# EAGLE board untitled (EAGLE 9.6.2)
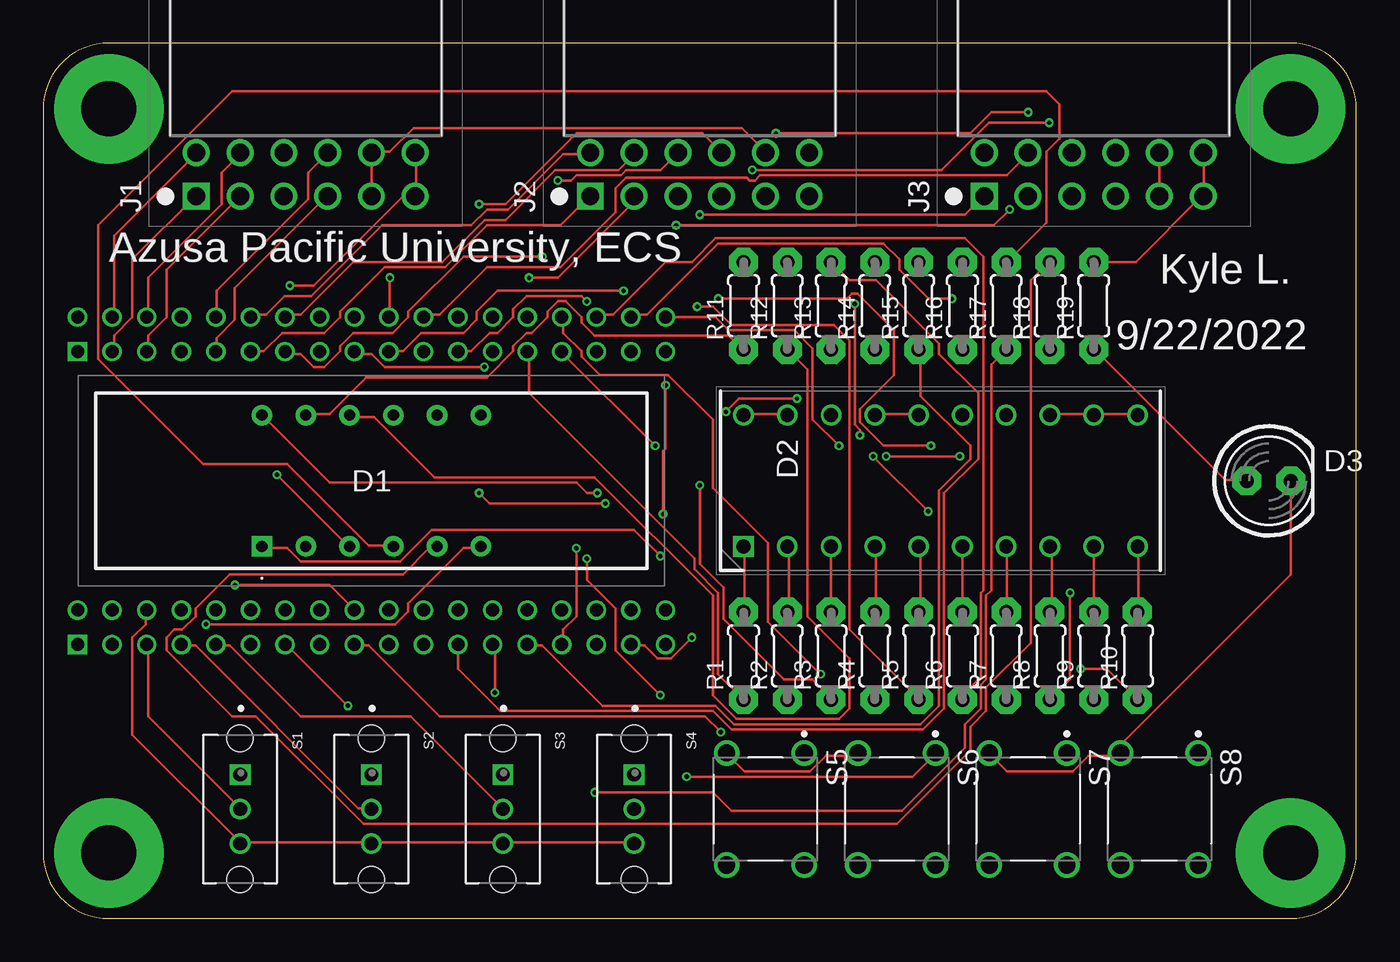
[diagram p0: board, top side]
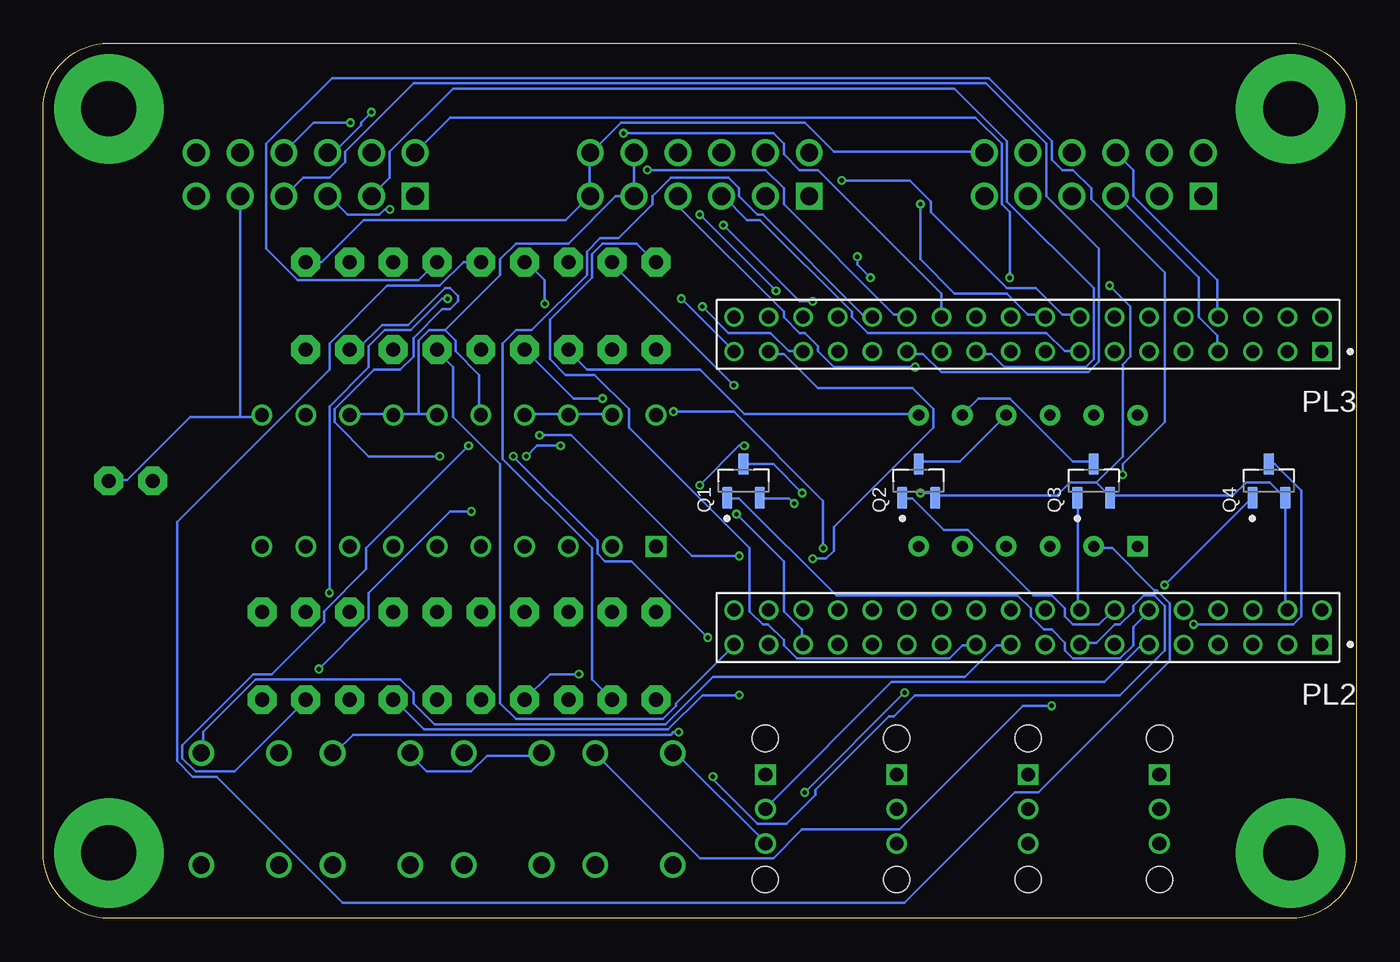
[diagram p1: board, bottom side, seen from below]

Size 76.2 x 50.8 mm. Coordinates in mm from the lower left corner, seen from the top.
Outline: 3.81,0 72.39,0 arc90 76.2,3.81 76.2,46.99 arc90 72.39,50.8 3.81,50.8 arc90 0,46.99 0,3.81 arc90 3.81,0
Copper layers (1*16): Top 0.035559375mm / dielectric 1.6mm / Bottom 0.035559375mm
Design rules "oshpark-2layer *": minimum track width 6mil, minimum drill 10mil, track to track 6mil, track to pad 6mil, pad to pad 6mil, via to via 6mil, smd to smd 6mil, copper to edge 15mil, drill to drill 6mil, minimum pad ring 5mil, minimum via ring 5mil, stop-mask expansion 2.5mil, vias tented up to drill 15mil, thermal gap 10mil

## Footprints (pad centres in the part's own frame; a part is rotated, then mirrored left to right if it is on the bottom)
LDQM282RI = drill 0.65 pad 1.192 square: 1 0,0 | drill 0.65 pad 1.192: 2 2.54,0; 3 5.08,0; 4 7.62,0; 5 10.16,0; 6 12.7,0; 7 12.7,7.62; 8 10.16,7.62; 9 7.62,7.62; 10 5.08,7.62; 11 2.54,7.62; 12 0,7.62
DIPS762W50P254L2527H825Q20N = drill 0.8 pad 1.2 square: 1 0,0 | drill 0.8 pad 1.2: 2 0,-2.54; 3 0,-5.08; 4 0,-7.62; 5 0,-10.16; 6 0,-12.7; 7 0,-15.24; 8 0,-17.78; 9 0,-20.32; 10 0,-22.86; 11 7.62,-22.86; 12 7.62,-20.32; 13 7.62,-17.78; 14 7.62,-15.24; 15 7.62,-12.7; 16 7.62,-10.16; 17 7.62,-7.62; 18 7.62,-5.08; 19 7.62,-2.54; 20 7.62,0
LED5MM = drill 0.813 pad 1.676 octagon: A -1.27,0; K 1.27,0
PMOD-SOCKET-FOR-HOST-BOARD = drill 1.04 pad 1.55 square: 1 0,0 | drill 1.04 pad 1.55: 2 2.54,0; 3 5.08,0; 4 7.62,0; 5 10.16,0; 6 12.7,0; 7 0,2.54; 8 2.54,2.54; 9 5.08,2.54; 10 7.62,2.54; 11 10.16,2.54; 12 12.7,2.54
MT_125_250 = drill 3.175 pad 6.35: 1 0,0
TE_4-1734506-1 = drill 0.75 pad 1.1 square: 1 0,0 | drill 0.75 pad 1.1: 2 0,-2; 3 2.007,0; 4 2.007,-2; 5 4.013,0; 6 4.013,-2; 7 6.02,0; 8 6.02,-2; 9 8.026,0; 10 8.026,-2; 11 10.033,0; 12 10.033,-2; 13 12.04,0; 14 12.04,-2; 15 14.046,0; 16 14.046,-2; 17 16.053,0; 18 16.053,-2; 19 18.059,0; 20 18.059,-2; 21 20.066,0; 22 20.066,-2; 23 22.073,0; 24 22.073,-2; 25 24.079,0; 26 24.079,-2; 27 26.086,0; 28 26.086,-2; 29 28.092,0; 30 28.092,-2; 31 30.099,0; 32 30.099,-2; 33 32.106,0; 34 32.106,-2; 35 34.112,0; 36 34.112,-2
SOT95P230X110-3N = smd 1.26 x 0.59: 1 -0.98,0.95; 2 -0.98,-0.95; 3 0.98,0
0204/5 = drill 0.813 pad 1.676 octagon: 1 -2.54,0; 2 2.54,0
SW_OS102011MS2QN1 = drill 0.8 square: 1 -2,0 | drill 0.8: 2 0,0; 3 2,0 | hole 1.5: -4.1,0; 4.1,0
SW_1825910-7 = drill 0.99: 1 -3.25,2.25; 2 3.25,2.25; 3 -3.25,-2.25; 4 3.25,-2.25

## Placement (x,y rotation side)
D1  [LDQM282RI]  12.7,21.59 0 top
D2  [DIPS762W50P254L2527H825Q20N]  40.64,21.59 90 top
D3  [LED5MM]  71.12,25.4 0 top
J1  [PMOD-SOCKET-FOR-HOST-BOARD]  8.89,41.91 0 top
J2  [PMOD-SOCKET-FOR-HOST-BOARD]  31.75,41.91 0 top
J3  [PMOD-SOCKET-FOR-HOST-BOARD]  54.61,41.91 0 top
MT1  [MT_125_250]  3.81,3.81 0 top
MT2  [MT_125_250]  72.39,46.99 0 top
MT3  [MT_125_250]  3.81,46.99 0 top
MT4  [MT_125_250]  72.39,3.81 0 top
PL2  [TE_4-1734506-1]  2,15.9 180 bottom
PL3  [TE_4-1734506-1]  2,32.9 180 bottom
Q1  [SOT95P230X110-3N]  35.56,25.4 90 bottom
Q2  [SOT95P230X110-3N]  25.4,25.4 90 bottom
Q3  [SOT95P230X110-3N]  15.24,25.4 90 bottom
Q4  [SOT95P230X110-3N]  5.08,25.4 90 bottom
R1  [0204/5]  40.64,15.24 90 top
R2  [0204/5]  43.18,15.24 90 top
R3  [0204/5]  45.72,15.24 90 top
R4  [0204/5]  48.26,15.24 90 top
R5  [0204/5]  50.8,15.24 90 top
R6  [0204/5]  53.34,15.24 90 top
R7  [0204/5]  55.88,15.24 90 top
R8  [0204/5]  58.42,15.24 90 top
R9  [0204/5]  60.96,15.24 90 top
R10  [0204/5]  63.5,15.24 90 top
R11  [0204/5]  40.64,35.56 90 top
R12  [0204/5]  43.18,35.56 90 top
R13  [0204/5]  45.72,35.56 90 top
R14  [0204/5]  48.26,35.56 90 top
R15  [0204/5]  50.8,35.56 90 top
R16  [0204/5]  53.34,35.56 90 top
R17  [0204/5]  55.88,35.56 90 top
R18  [0204/5]  58.42,35.56 90 top
R19  [0204/5]  60.96,35.56 90 top
S1  [SW_OS102011MS2QN1]  11.43,6.35 270 top
S2  [SW_OS102011MS2QN1]  19.05,6.35 270 top
S3  [SW_OS102011MS2QN1]  26.67,6.35 270 top
S4  [SW_OS102011MS2QN1]  34.29,6.35 270 top
S5  [SW_1825910-7]  41.91,6.35 270 top
S6  [SW_1825910-7]  49.53,6.35 270 top
S7  [SW_1825910-7]  57.15,6.35 270 top
S8  [SW_1825910-7]  64.77,6.35 270 top

## Library data of the parts
D1 = eagle-library-engr-240-f22; DESCRIPTION: LED Displays & Accessories LED Display; HEIGHT: 6.05mm; MANUFACTURER_NAME: Lumex; MANUFACTURER_PART_NUMBER: LDQ-M282RI; MOUSER_PART_NUMBER: 696-LDQ-M282RI; MOUSER_PRICE-STOCK: https://www.mouser.com/Search/Refine.aspx?Keyword=696-LDQ-M282RI
D2 = eagle-library-engr-240-f22; DESCRIPTION: LED Uni-Color Green 565nm 20-Pin PDIP; HEIGHT: 8.25mm; MANUFACTURER_NAME: Lite-On; MANUFACTURER_PART_NUMBER: LTA-1000G; MOUSER_PART_NUMBER: 859-LTA-1000G; MOUSER_PRICE-STOCK: https://www.mouser.co.uk/ProductDetail/Lite-On/LTA-1000G?qs=%2FTKcI5XXRKq0QINzVmwJHg%3D%3D
D3 J1-J3 MT1-MT4 PL2 PL3 R1-R19 = eagle-library-engr-240-f22
Q1-Q4 = eagle-library-engr-240-f22; MANUFACTURER: Nexperia; MAXIMUM_PACKAGE_HEIGHT: 1.10 mm; PARTREV: 1; SNAPEDA_PN: NX2301P; STANDARD: IPC 7351B
S1-S4 = eagle-library-engr-240-f22; MANUFACTURER: C&K; STANDARD: MANUFACTURER RECOMMENDATIONS
S5-S8 = eagle-library-engr-240-f22; MANUFACTURER: TE Connectivity; PARTREV: C10; STANDARD: Manufacturer Recommendation

## Nets
3.3V: J1.6 J1.12 J2.6 J2.12 J3.6 J3.12 PL2.4 Q1.2 Q2.2 Q3.2 Q4.2 R19.2
BAR_1: PL3.27 R1.1
BAR_2: PL3.28 R2.1
BAR_3: PL3.29 R3.1
BAR_4: PL3.30 R4.1
BAR_5: PL3.31 R5.1
BAR_6: PL3.32 R6.1
BAR_7: PL3.33 R7.1
BAR_8: PL3.34 R8.1
BAR_9: PL3.35 R9.1
BAR_10: PL3.36 R10.1
BUTTON_1: PL2.13 S5.1
BUTTON_2: PL2.15 S6.1
BUTTON_3: PL2.17 S7.1
BUTTON_4: PL2.19 S8.1
DIGIT_1: PL2.12 Q1.1
DIGIT_1_A: D1.12 Q1.3
DIGIT_2: PL2.14 Q2.1
DIGIT_2_A: D1.9 Q2.3
DIGIT_3: PL2.16 Q3.1
DIGIT_3_A: D1.8 Q3.3
DIGIT_4: PL2.18 Q4.1
DIGIT_4_A: D1.6 Q4.3
GND: D2.11 D2.12 D2.13 D2.14 D2.15 D2.16 D2.17 D2.18 D2.19 D2.20 D3.K J1.5 J1.11 J2.5 J2.11 J3.5 J3.11 PL2.6 S1.3 S2.3 S3.3 S4.3 S5.3 S6.3 S7.3 S8.3
N$1: D2.1 R1.2
N$2: D2.2 R2.2
N$3: D2.3 R3.2
N$4: D2.4 R4.2
N$5: D2.5 R5.2
N$6: D2.6 R6.2
N$7: D2.7 R7.2
N$8: D2.8 R8.2
N$9: D2.9 R9.2
N$10: D2.10 R10.2
N$11: D1.11 R11.1
N$12: D1.10 R12.1
N$13: D1.7 R13.1
N$14: D1.1 R14.2
N$15: D1.2 R15.2
N$16: D1.3 R16.2
N$17: D1.4 R17.2
N$18: D1.5 R18.2
N$19: D3.A R19.1
PMOD_1_1: J1.1 PL3.3
PMOD_1_2: J1.2 PL3.5
PMOD_1_3: J1.3 PL3.7
PMOD_1_4: J1.4 PL3.9
PMOD_1_5: J1.7 PL3.4
PMOD_1_6: J1.8 PL3.6
PMOD_1_7: J1.9 PL3.8
PMOD_1_8: J1.10 PL3.10
PMOD_2_1: J2.1 PL3.11
PMOD_2_2: J2.2 PL3.13
PMOD_2_3: J2.3 PL3.15
PMOD_2_4: J2.4 PL3.17
PMOD_2_5: J2.7 PL3.12
PMOD_2_6: J2.8 PL3.14
PMOD_2_7: J2.9 PL3.16
PMOD_2_8: J2.10 PL3.18
PMOD_3_1: J3.1 PL3.19
PMOD_3_2: J3.2 PL3.21
PMOD_3_3: J3.3 PL3.23
PMOD_3_4: J3.4 PL3.25
PMOD_3_5: J3.7 PL3.20
PMOD_3_6: J3.8 PL3.22
PMOD_3_7: J3.9 PL3.24
PMOD_3_8: J3.10 PL3.26
SEGMENT_A: PL2.21 R11.2
SEGMENT_B: PL2.23 R13.2
SEGMENT_C: PL2.25 R17.1
SEGMENT_D: PL2.27 R15.1
SEGMENT_DP: PL2.35 R16.1
SEGMENT_E: PL2.29 R14.1
SEGMENT_F: PL2.31 R12.2
SEGMENT_G: PL2.33 R18.1
SWITCH_1: PL2.5 S1.2
SWITCH_2: PL2.7 S2.2
SWITCH_3: PL2.9 S3.2
SWITCH_4: PL2.11 S4.2

## Tracks (layer width: path | path; a pad name or v marks a point on that pad's centre or on a via)
3.3V  (via drill 0.25)
  Top 0.152: v32.61,24.08 25.91,24.08 v25.3,24.69 | J3.12 67.36,44.35 67.36,41.91 J3.6 67.21,41.91 63.4,38.1 R19.2 | J1.12 21.64,44.35 21.64,41.91 J1.6 20.88,41.91 15.7,36.73 v14.33,36.73
  Bottom 0.152: PL2.4 4.12,17.98 4.12,24.38 Q4.2 4.27,24.54 5.03,25.3 6.4,25.3 7.16,24.54 14.17,24.54 Q3.2 14.33,24.54 15.09,25.3 | 15.09,25.3 16.61,25.3 17.37,24.54 24.38,24.54 Q2.2 24.54,24.54 24.69,24.69 v25.3,24.69 | v32.61,24.08 32.92,24.38 34.59,24.38 Q1.2 | 44.5,41.91 44.5,44.35 J2.12 44.35,44.5 42.67,46.18 32,46.18 30.33,44.5 21.64,44.5 J1.12 | R19.2 60.05,38.1 57.61,40.54 45.87,40.54 44.5,41.91 | 44.5,41.91 J2.6 | 15.09,25.3 13.56,26.82 13.56,32.16 13.11,32.61 13.11,35.51 v14.33,36.73
BAR_1
  Top 0.152: R1.1 39.17,14.17 39.17,18.9 37.8,20.27 37.8,20.88 28.19,30.48 28.19,32.77 PL3.27
BAR_2
  Bottom 0.152: R2.1 44.35,13.87 44.35,21.49 49.53,26.67 49.53,33.38 48.77,34.14 47.85,34.14 44.65,37.34 44.65,38.71 43.89,39.47 42.82,39.47 40.84,41.45 40.84,41.91 39.78,42.98 36.42,42.98 35.81,42.37 35.81,41.91 34.75,40.84 34.44,40.84 28.65,35.05 28.19,35.05 PL3.28
BAR_3  (via drill 0.25)
  Top 0.152: v35.51,27.43 30.18,32.77 PL3.29 | v38.1,25.15 38.1,20.57 39.47,19.2 39.47,17.37 42.98,13.87 44.65,13.87 45.72,12.8 R3.1
  Bottom 0.152: v35.51,27.43 35.81,27.43 v38.1,25.15
BAR_4  (via drill 0.25)
  Top 0.152: v45.11,14.17 42.06,17.22 42.06,21.79 38.86,24.99 38.86,28.96 36.27,31.55 32.31,31.55 31.24,32.61 31.24,32.92 30.18,33.98 30.18,34.9 PL3.30
  Bottom 0.152: v45.11,14.17 46.79,14.17 R4.1
BAR_5  (via drill 0.25)
  Top 0.152: v37.95,35.51 38.86,35.51 39.93,34.44 45.87,34.44 46.79,33.53 46.79,16.76 50.75,12.8 R5.1
  Bottom 0.152: v37.95,35.51 36.42,33.98 33.98,33.98 32.92,32.92 32.16,32.92 PL3.31
BAR_6
  Top 0.152: R6.1 53.34,12.95 54.41,14.02 54.41,18.9 54.56,19.05 54.56,38.41 53.49,39.47 39.01,39.47 37.64,38.1 36.12,38.1 33.07,35.05 32.16,35.05 PL3.32
BAR_7  (via drill 0.25)
  Top 0.152: v31.55,20.88 31.55,19.66 33.22,17.98 33.22,15.54 v35.81,12.95
  Bottom 0.152: v31.55,20.88 30.79,20.88 30.33,21.34 30.33,22.71 24.54,28.5 24.54,29.57 25.76,30.79 31.24,30.79 33.22,32.77 33.98,32.77 PL3.33 | v35.81,12.95 37.95,12.95 39.93,10.97 54.1,10.97 55.78,12.65 R7.1
BAR_8  (via drill 0.25)
  Top 0.152: v52.73,35.97 51.36,35.97 49.68,37.64 49.68,38.25 48.77,39.17 39.17,39.17 35.05,35.05 34.14,35.05 PL3.34 | v59.59,18.9 59.59,13.87 R8.1
  Bottom 0.152: v52.73,35.97 53.03,35.97 54.86,34.14 56.39,34.14 57.3,33.22 57.3,32 59.59,29.72 v59.59,18.9
BAR_9  (via drill 0.25)
  Top 0.152: v39.17,35.97 46.63,35.97 46.94,36.27 47.24,36.27 49.38,34.14 49.38,31.55 47.4,29.57 47.4,28.8 48.77,27.43 v51.51,27.43
  Bottom 0.152: v39.17,35.97 36.12,32.92 PL3.35 | v51.51,27.43 57.45,21.49 57.45,20.27 59.89,17.83 59.89,17.22 62.94,14.17 64.01,14.17 68.12,10.06 68.12,9.3 67.36,8.53 65.08,8.53 60.96,12.65 R9.1
BAR_10  (via drill 0.25)
  Top 0.152: v46.18,27.43 44.65,28.96 44.65,33.07 43.59,34.14 39.78,34.14 39.01,34.9 PL3.36 | v51.36,23.62 v48.16,26.82 | v60.2,14.48 61.72,14.48 R10.1
  Bottom 0.152: v46.18,27.43 47.55,27.43 v48.16,26.82 | v51.36,23.62 52.58,23.62 57.3,18.9 57.3,17.37 v60.2,14.48
BUTTON_1  (via drill 0.25)
  Top 0.152: v17.68,12.34 14.17,15.85 PL2.13
  Bottom 0.152: v17.68,12.34 19.36,12.34 26.52,5.18 32.16,5.18 33.83,3.5 38.1,3.5 44.04,9.45 S5.1
BUTTON_2  (via drill 0.25)
  Top 0.152: v37.34,8.23 50.44,8.23 51.66,9.45 S6.1
  Bottom 0.152: v37.34,8.23 37.34,8.08 34.75,5.49 33.07,5.49 31.39,7.16 31.39,7.47 27.13,11.73 26.82,11.73 25.6,12.95 13.72,12.95 11.12,15.54 11.12,18.14 11.73,18.75 12.34,18.75 12.95,18.14 12.95,17.83 13.72,17.07 14.02,17.07 15.09,16 16,16 PL2.15
BUTTON_3  (via drill 0.25)
  Top 0.152: v39.32,10.82 38.41,11.73 23.01,11.73 18.9,15.85 18.14,15.85 PL2.17
  Bottom 0.152: v39.32,10.82 39.62,10.82 39.78,10.67 58.22,10.67 59.28,9.6 S7.1
BUTTON_4
  Bottom 0.152: PL2.19 20.12,15.85 20.88,15.85 22.71,14.02 37.34,14.02 40.08,11.28 53.49,11.28 54.71,12.5 54.71,13.11 55.47,13.87 63.86,13.87 66.9,10.82 66.9,9.6 S8.1
DIGIT_1
  Bottom 0.152: Q1.1 36.42,24.38 35.81,24.38 30.18,18.75 19.66,18.75 18.9,17.98 18.9,17.53 18.14,16.76 17.68,16.76 16.92,16 16.92,15.54 16.46,15.09 13.72,15.09 12.95,15.85 12.95,16.92 12.04,17.83 PL2.12
DIGIT_1_A  (via drill 0.25)
  Top 0.152: v32.16,24.69 31.55,24.69 30.94,25.3 16.61,25.3 D1.12
  Bottom 0.152: v32.16,24.69 33.83,26.36 35.51,26.36 Q1.3
DIGIT_2
  Bottom 0.152: Q2.1 26.21,24.38 25.76,24.38 23.93,22.55 22.55,22.55 18.75,18.75 17.68,18.75 16.92,17.98 16.92,17.53 16.46,17.07 14.94,17.07 14.17,17.83 PL2.14
DIGIT_2_A
  Bottom 0.152: D1.9 23.01,26.52 25.3,26.52 Q2.3
DIGIT_3
  Bottom 0.152: Q3.1 16.15,24.38 16.15,17.98 PL2.16
DIGIT_3_A
  Bottom 0.152: Q3.3 15.24,26.52 16.46,26.52 20.12,30.18 21.95,30.18 22.86,29.26 D1.8
DIGIT_4  (via drill 0.25)
  Top 0.152: v11.12,19.36 16.61,19.36 17.98,17.98 PL2.18
  Bottom 0.152: v11.12,19.36 6.1,24.38 Q4.1
DIGIT_4_A  (via drill 0.25)
  Top 0.152: v9.45,17.07 20.42,17.07 21.18,17.83 21.18,18.29 24.38,21.49 25.3,21.49 D1.6
  Bottom 0.152: v9.45,17.07 3.66,17.07 3.2,17.53 3.2,24.84 4.72,26.36 5.03,26.36 Q4.3
GND
  Top 0.152: S7.3 55.02,9.45 55.93,8.53 59.74,8.53 60.66,9.45 62.48,9.45 S8.3 62.64,9.6 62.64,10.21 72.39,19.96 D3.K | 11.43,4.42 5.18,10.67 5.18,16.31 5.94,17.07 5.94,17.83 PL2.6 | 11.43,4.42 19.05,4.42 | 11.43,4.42 S1.3 | 19.05,4.42 26.67,4.42 | 19.05,4.42 S2.3 | 26.67,4.42 34.29,4.42 S4.3 | 26.67,4.42 S3.3 | S6.3 47.24,9.45 45.41,9.45 44.5,8.53 40.69,8.53 39.78,9.45 S5.3 | J1.5 J1.11 19.05,44.5 20.12,44.5 21.49,45.87 40.54,45.87 41.91,44.5 J2.11 | D2.17 48.31,29.26 50.75,29.26 D2.16 | D2.20 40.69,29.26 43.13,29.26 D2.19 | J3.11 J3.5 | 60.96,29.26 58.52,29.26 D2.13 | 60.96,29.26 63.4,29.26 D2.11 | 60.96,29.26 D2.12
  Bottom 0.152: S6.3 47.4,9.45 50.44,9.45 51.36,8.53 53.95,8.53 54.86,9.45 S7.3 | S5.3 39.62,9.45 39.32,9.45 34.29,4.42 S4.3 | J2.11 J2.5 42.98,41.91 45.72,39.17 48.77,39.17 49.68,38.25 49.68,37.34 52.88,34.14 | 45.72,29.26 43.28,29.26 D2.19 | 45.72,29.26 48.16,29.26 D2.17 | 45.72,29.26 D2.18 | 54.41,29.26 55.78,29.26 D2.14 55.93,29.26 58.37,29.26 D2.13 | 54.41,29.26 53.34,29.26 D2.15 | 64.77,29.11 63.55,29.11 D2.11 | 64.77,29.11 67.67,29.11 71.32,25.45 72.39,25.45 D3.K | 64.77,29.11 J3.5 | 52.88,34.14 52.27,33.53 52.27,32.92 50.9,31.55 50.9,29.26 D2.16 | 52.88,34.14 53.8,34.14 54.41,33.53 54.41,29.26
N$1
  Top 0.152: D2.1 40.69,21.49 40.69,17.83 R1.2
N$2
  Top 0.152: D2.2 43.28,21.49 43.28,17.83 R2.2
N$3
  Top 0.152: R3.2 D2.3
N$4
  Top 0.152: D2.4 48.31,21.49 48.31,17.83 R4.2
N$5
  Top 0.152: D2.5 50.9,21.49 50.9,17.83 R5.2
N$6
  Top 0.152: R6.2 D2.6
N$7
  Top 0.152: D2.7 55.93,21.49 55.93,17.83 R7.2
N$8
  Top 0.152: D2.8 58.52,21.49 58.52,17.83 R8.2
N$9
  Top 0.152: R9.2 D2.9
N$10
  Top 0.152: D2.10 63.55,21.49 63.55,17.83 R10.2
N$11
  Top 0.152: D1.11 15.24,29.26 16.61,29.26 18.75,31.39 25.76,31.39 27.28,32.92 27.28,33.22 28.04,33.98 28.35,33.98 29.26,34.9 29.26,35.2 29.87,35.81 30.33,35.81 31.24,34.9 31.24,34.59 32,33.83 39.78,33.83 40.54,33.07 R11.1
N$12
  Top 0.152: R12.1 44.35,31.85 44.35,17.53 46.79,15.09 46.79,12.19 46.18,11.58 40.23,11.58 38.86,12.95 38.86,18.75 32,25.6 22.71,25.6 19.2,29.11 17.83,29.11 D1.10
N$13
  Bottom 0.152: D1.7 25.45,29.26 35.51,29.26 38.1,31.85 44.65,31.85 45.72,32.92 R13.1
N$14  (via drill 0.25)
  Top 0.152: v35.81,21.03 34.29,22.55 22.55,22.55 20.73,20.73 14.94,20.73 14.17,21.49 12.8,21.49 D1.1 | v47.4,28.04 47.4,28.35 47.09,28.65 v47.09,35.66
  Bottom 0.152: v35.81,21.03 38.56,21.03 45.57,28.04 v47.4,28.04 | v47.09,35.66 47.09,37.03 48.16,38.1 R14.2
N$15
  Bottom 0.152: R15.2 51.82,38.1 53.19,36.73 56.24,36.73 59.59,33.38 59.59,31.85 68.43,23.01 68.43,9.14 67.51,8.23 66.14,8.23 58.83,0.91 26.21,0.91 19.81,7.32 18.44,7.32 10.82,14.94 10.82,18.29 11.58,19.05 11.73,19.05 14.17,21.49 15.24,21.49 D1.2
N$16  (via drill 0.25)
  Top 0.152: v13.56,25.76 17.68,21.64 D1.3
  Bottom 0.152: v13.56,25.76 13.56,26.36 11.12,28.8 11.12,37.49 15.39,41.76 15.39,42.37 16.46,43.43 17.07,43.43 17.68,44.04 17.68,45.11 21.34,48.77 59.44,48.77 63.25,44.96 63.25,38.86 61.42,37.03 54.41,37.03 R16.2
N$17
  Top 0.152: D1.4 20.27,21.64 18.9,21.64 14.17,26.36 9.3,26.36 3.2,32.46 3.2,40.23 10.97,48.01 58.22,48.01 58.98,47.24 58.98,45.26 58.22,44.5 58.22,40.39 55.93,38.1 R17.2
N$18
  Top 0.152: D1.5 22.86,21.49 22.4,21.49 20.88,19.96 10.82,19.96 8.84,17.98 8.84,17.53 8.08,16.76 7.62,16.76 7.16,16.31 7.16,15.54 10.97,11.73 12.34,11.73 18.59,5.49 49.53,5.49 53.8,9.75 53.8,11.12 54.71,12.04 54.71,13.41 57.3,16 57.3,37.03 58.37,38.1 R18.2
N$19
  Top 0.152: D3.A 69.8,25.45 68.58,25.45 60.96,33.07 R19.1
PMOD_1_1
  Top 0.152: PL3.3 4.12,32.92 4.12,33.83 5.18,34.9 5.18,38.25 8.84,41.91 J1.1
PMOD_1_2
  Top 0.152: J1.2 7.16,37.64 7.16,34.9 6.1,33.83 6.1,32.92 PL3.5
PMOD_1_3
  Bottom 0.152: PL3.7 8.08,32.92 8.08,33.83 9.14,34.9 9.14,37.19 13.87,41.91 J1.3
PMOD_1_4
  Top 0.152: PL3.9 10.06,32.92 10.06,33.68 11.12,34.75 11.12,36.58 16.46,41.91 J1.4
PMOD_1_5
  Top 0.152: PL3.4 4.12,35.05 4.12,39.62 8.84,44.35 J1.7
PMOD_1_6
  Top 0.152: PL3.6 6.1,35.05 6.1,37.19 10.36,41.45 10.36,43.28 11.43,44.35 J1.8
PMOD_1_7
  Bottom 0.152: J1.9 12.95,43.43 12.95,41.91 8.08,37.03 8.08,35.05 PL3.8
PMOD_1_8
  Top 0.152: PL3.10 10.06,35.05 10.06,36.42 15.39,41.76 15.39,43.28 16.46,44.35 J1.10
PMOD_2_1
  Top 0.152: PL3.11 12.04,32.92 12.8,32.92 13.87,33.98 16.31,33.98 17.22,34.9 17.22,35.2 19.81,37.8 23.32,37.8 25.76,40.23 30.02,40.23 31.7,41.91 J2.1
PMOD_2_2  (via drill 0.25)
  Top 0.152: v28.96,38.41 24.38,38.41 21.18,35.2 21.18,34.9 20.27,33.98 17.98,33.98 17.22,33.22 17.22,32.92 16.31,32 15.7,32 14.94,32.77 14.17,32.77 PL3.13 | v28.19,37.19 29.87,37.19 34.29,41.6 J2.2
  Bottom 0.152: v28.96,38.41 28.96,37.95 v28.19,37.19
PMOD_2_3
  Bottom 0.152: PL3.15 16.15,32.92 16.92,32.92 17.98,33.98 28.35,33.98 29.26,34.9 29.26,35.2 34.59,40.54 35.36,40.54 36.73,41.91 J2.3
PMOD_2_4  (via drill 0.25)
  Top 0.152: v25.6,32 19.81,32 19.05,32.77 18.14,32.77 PL3.17
  Bottom 0.152: v25.6,32 30.33,32 31.24,32.92 31.24,33.22 32,33.98 32.31,33.98 33.22,34.9 33.22,35.2 39.32,41.3 39.32,41.91 J2.4
PMOD_2_5
  Top 0.152: PL3.12 12.04,35.05 12.95,35.05 14.02,36.12 15.54,36.12 19.66,40.23 24.84,40.23 25.76,41.15 26.98,41.15 30.18,44.35 31.7,44.35 J2.7
PMOD_2_6
  Top 0.152: PL3.14 14.17,35.05 14.94,35.05 17.98,38.1 23.16,38.1 25.6,40.54 26.82,40.54 29.72,43.43 33.38,43.43 34.29,44.35 J2.8
PMOD_2_7  (via drill 0.25)
  Top 0.152: v29.87,42.82 30.63,42.82 30.94,43.13 33.53,43.13 33.83,43.43 35.81,43.43 J2.9
  Bottom 0.152: v29.87,42.82 25.91,42.82 24.69,41.6 24.69,41 20.27,36.58 18.59,36.58 17.07,35.05 16.15,35.05 PL3.16
PMOD_2_8  (via drill 0.25)
  Top 0.152: v25.3,41.45 26.82,41.45 30.94,45.57 38.25,45.57 J2.10
  Bottom 0.152: v25.3,41.45 25.3,38.25 23.32,36.27 20.27,36.27 19.05,35.05 18.14,35.05 PL3.18
PMOD_3_1  (via drill 0.25)
  Top 0.152: v33.68,36.42 26.36,36.42 25.15,35.2 25.15,34.75 24.38,33.98 21.95,33.98 20.88,32.92 20.12,32.92 PL3.19 | v38.1,40.84 53.49,40.84 54.56,41.91 J3.1
  Bottom 0.152: v38.1,40.84 v33.68,36.42
PMOD_3_2
  Bottom 0.152: J3.2 56.08,42.98 56.08,44.5 52.43,48.16 23.32,48.16 20.27,45.11 20.27,41.6 15.24,36.58 15.24,32.46 15.7,32 20.42,32 21.18,32.77 21.95,32.77 PL3.21
PMOD_3_3  (via drill 0.25)
  Top 0.152: v31.55,35.81 31.24,36.12 28.04,36.12 27.28,35.36 27.28,34.9 26.36,33.98 25.91,33.98 24.84,32.92 24.08,32.92 PL3.23 | v36.73,40.23 55.17,40.23 v56.08,41.15
  Bottom 0.152: v31.55,35.81 32.31,35.81 v36.73,40.23 | v56.08,41.15 56.39,41.15 56.69,40.84 58.52,40.84 59.59,41.91 J3.3
PMOD_3_4
  Bottom 0.152: PL3.25 26.06,32.77 25.15,32.77 24.08,31.7 15.54,31.7 14.94,32.31 14.94,38.86 17.98,41.91 17.98,44.96 21.49,48.46 54.71,48.46 58.67,44.5 58.67,43.89 59.59,42.98 61.11,42.98 62.18,41.91 J3.4
PMOD_3_5  (via drill 0.25)
  Top 0.152: v20.12,37.19 20.12,35.05 PL3.20
  Bottom 0.152: v20.12,37.19 20.12,41 20.57,41.45 20.57,44.96 22.1,46.48 52.58,46.48 J3.7
PMOD_3_6
  Top 0.152: PL3.22 22.1,35.05 23.01,35.05 25.76,37.8 30.02,37.8 33.22,41 33.22,42.37 33.83,42.98 40.84,42.98 41,42.82 41.3,42.82 41.6,43.13 55.93,43.13 57.15,44.35 J3.8
PMOD_3_7  (via drill 0.25)
  Top 0.152: v42.52,45.57 53.8,45.57 55.02,46.79 v57.15,46.79
  Bottom 0.152: v42.52,45.57 33.83,45.57 33.22,44.96 33.22,44.35 32.31,43.43 31.24,43.43 24.08,36.27 24.08,35.05 PL3.24 | v57.15,46.79 57.76,46.18 57.76,46.02 59.28,44.5 59.59,44.5 J3.9
PMOD_3_8  (via drill 0.25)
  Top 0.152: v41.15,43.43 52.12,43.43 54.86,46.18 v58.37,46.18
  Bottom 0.152: v41.15,43.43 34.29,43.43 33.22,42.37 33.22,41.45 26.82,35.05 26.21,35.05 PL3.26 | v58.37,46.18 60.5,46.18 J3.10
SEGMENT_A
  Bottom 0.152: PL2.21 22.1,15.85 22.86,15.85 23.62,15.09 32.46,15.09 33.22,15.85 33.22,16.15 34.14,17.07 34.44,17.07 35.2,17.83 35.2,21.49 42.22,28.5 42.22,29.57 44.2,31.55 45.87,31.55 46.79,32.46 46.79,34.75 44.35,37.19 44.35,38.56 43.74,39.17 41.76,39.17 40.69,38.1 R11.2
SEGMENT_B
  Top 0.152: R13.2 46.79,37.03 48.31,37.03 51.97,33.38 51.97,32.77 54.25,30.48 54.25,26.67 52.27,24.69 52.27,12.19 51.05,10.97 39.93,10.97 38.86,12.04 26.52,12.04 24.08,14.48 24.08,15.85 PL2.23
SEGMENT_C  (via drill 0.25)
  Top 0.152: v26.21,13.11 26.21,15.85 PL2.25 | v32,7.32 38.86,7.32 39.93,6.25 49.84,6.25 53.49,9.91 53.49,11.28 54.41,12.19 54.41,13.56 54.71,13.87 54.71,18.75 55.02,19.05 55.02,32.16 R17.1
  Bottom 0.152: v32,7.32 v26.21,13.11
SEGMENT_D
  Top 0.152: PL2.27 28.19,15.85 28.96,15.85 32.46,12.34 39.01,12.34 40.08,11.28 50.9,11.28 51.97,12.34 51.97,24.84 53.8,26.67 53.8,27.43 50.9,30.33 50.9,32.92 R15.1
SEGMENT_DP
  Bottom 0.152: PL2.35 36.12,15.85 39.47,12.5 39.47,12.34 40.23,11.58 48.77,11.58 49.68,12.5 49.68,26.36 52.43,29.11 52.43,32 53.34,32.92 R16.1
SEGMENT_E  (via drill 0.25)
  Top 0.152: v30.94,21.49 30.94,17.53 30.18,16.76 30.18,16 PL2.29 | v39.62,29.41 40.39,30.18 v43.74,30.18
  Bottom 0.152: v30.94,21.49 30.94,24.23 36.12,29.41 v39.62,29.41 | v43.74,30.18 45.41,30.18 R14.1
SEGMENT_F  (via drill 0.25)
  Top 0.152: v35.97,23.47 35.97,27.13 36.12,27.28 v36.12,30.94
  Bottom 0.152: v35.97,23.47 33.22,20.73 33.22,17.83 32.16,16.76 32.16,16 PL2.31 | v36.12,30.94 43.28,38.1 R12.2
SEGMENT_G  (via drill 0.25)
  Top 0.152: v37.64,16.31 36.42,15.09 35.66,15.09 34.9,15.85 34.14,15.85 PL2.33 | v53.19,26.82 v48.92,26.82
  Bottom 0.152: v37.64,16.31 42.06,20.73 43.59,20.73 44.04,21.18 44.04,21.95 v48.92,26.82 | v53.19,26.82 57.3,26.82 59.28,28.8 59.28,29.57 57,31.85 55.47,31.85 54.71,32.61 54.71,33.68 53.03,35.36 52.58,35.36 52.12,35.81 52.12,36.12 52.58,36.58 52.88,36.58 55.02,34.44 56.54,34.44 57.91,33.07 58.37,33.07 R18.1
SWITCH_1
  Top 0.152: PL2.5 6.1,15.85 6.1,11.73 11.43,6.4 S1.2
SWITCH_2
  Top 0.152: PL2.7 8.08,15.85 8.84,15.85 18.29,6.4 19.05,6.4 S2.2
SWITCH_3
  Top 0.152: PL2.9 10.06,15.85 10.82,15.85 14.94,11.73 21.34,11.73 26.67,6.4 S3.2
SWITCH_4
  Bottom 0.152: PL2.11 12.04,15.85 12.5,15.85 14.63,13.72 26.98,13.72 34.29,6.4 S4.2

## Text on the board
tPlace: Azusa Pacific University, ECS | Kyle L. | 9/22/2022